# EAGLE board MeterMaidV2 (EAGLE 9.5.2)
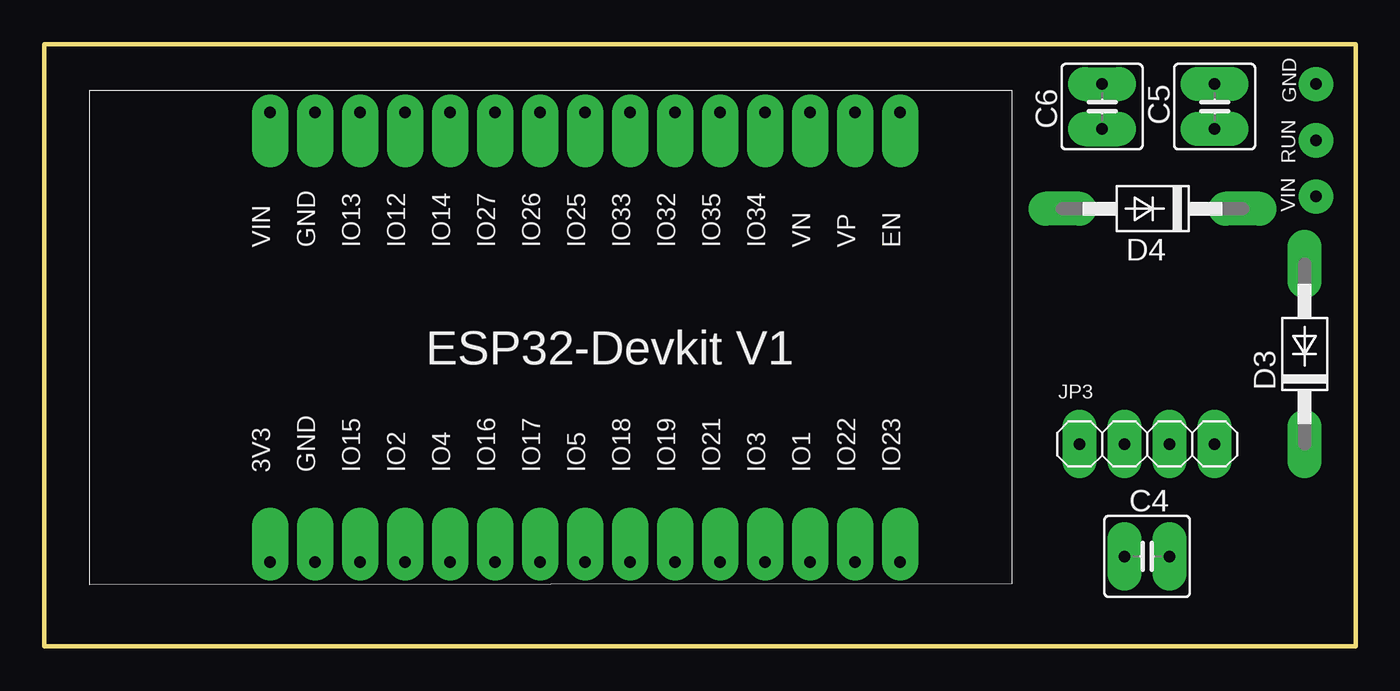
[diagram p0: board, top side]
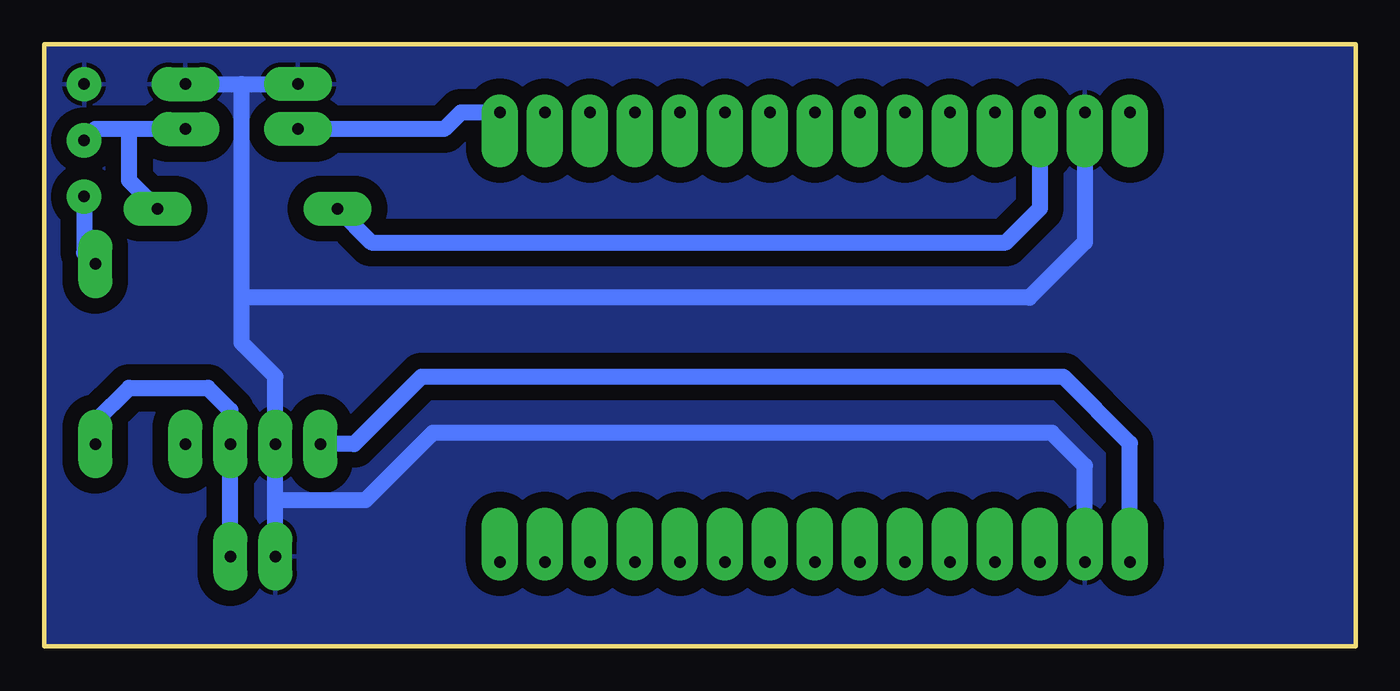
[diagram p1: board, bottom side, seen from below]

Size 74 x 34 mm. Coordinates in mm from the lower left corner, seen from the top.
Outline: 0,0 74,0 74,34 0,34 0,0
Copper layers (1*16): Top 0.035mm / dielectric 1.5mm / Bottom 0.035mm
Design rules "default *": minimum track width 6mil, minimum drill 0.35mm, track to track 6mil, track to pad 6mil, pad to pad 6mil, via to via 6mil, smd to smd 6mil, copper to edge 0mil, drill to drill 6mil, minimum pad ring 10mil, minimum via ring 8mil, stop-mask expansion 4mil, vias tented up to drill 0mil, thermal gap 10mil

## Footprints (pad centres in the part's own frame; a part is rotated, then mirrored left to right if it is on the bottom)
C025-050X050 = drill 0.65 pad 1.93 long: 1 -1.27,0; 2 1.27,0
DO41-10 = drill 0.65 pad 1.93 long: A 5.08,0; C -5.08,0
1X01LP = drill 0.65 pad 1.93: P$1 0,0
1X04 = drill 0.65 pad 1.93 long: 1 -3.81,0; 2 -1.27,0; 3 1.27,0; 4 3.81,0
ESP32-DEVKITV2 = drill 0.65 pad 2.057 offset: 1 -22.86,-13.97; 2 -20.32,-13.97; 3 -17.78,-13.97; 4 -15.24,-13.97; 5 -12.7,-13.97; 6 -10.16,-13.97; 7 -7.62,-13.97; 8 -5.08,-13.97; 9 -2.54,-13.97; 10 0,-13.97; 11 2.54,-13.97; 12 5.08,-13.97; 13 7.62,-13.97; 14 10.16,-13.97; 15 12.7,-13.97; 16 12.7,11.43; 17 10.16,11.43; 18 7.62,11.43; 19 5.08,11.43; 20 2.54,11.43; 21 0,11.43; 22 -2.54,11.43; 23 -5.08,11.43; 24 -7.62,11.43; 25 -10.16,11.43; 26 -12.7,11.43; 27 -15.24,11.43; 28 -17.78,11.43; 29 -20.32,11.43; 30 -22.86,11.43

## Placement (x,y rotation side)
C4  47uf  [C025-050X050]  62.23,5.08 0 top
C5  100nf  [C025-050X050]  66.04,30.48 90 top
C6  100nf  [C025-050X050]  59.69,30.48 270 top
D3  1N4004  [DO41-10]  71.12,16.51 90 top
D4  1N4004  [DO41-10]  62.53,24.71 180 top
GND  [1X01LP]  71.75,31.75 0 top
JP3  [1X04]  62.23,11.43 0 top
RUN  [1X01LP]  71.75,28.57 0 top
U$1  [ESP32-DEVKITV2]  35.6,18.72 0 top
VIN  [1X01LP]  71.75,25.4 0 top

## Library data of the parts
C4-C6 = rcl; SPICEPREFIX: C
D3 D4 GND JP3 RUN VIN = Sam
U$1 = ESP32-DEVKITV1MOD

## Nets
GND: C4.1 C5.2 C6.1 GND.P$1 JP3.2 U$1.2 U$1.29
N$1: JP3.1 U$1.1
N$2: C4.2 D3.C JP3.3
N$3: D4.A U$1.28
N$4: C5.1 D4.C RUN.P$1
N$5: C6.2 U$1.16
N$6: D3.A VIN.P$1

## Tracks (layer width: path | path; a pad name or v marks a point on that pad's centre or on a via)
GND
  Bottom 0.889: C5.2 62.87,31.75 | 62.87,31.75 C6.1 | 62.87,19.68 62.87,17.14 60.96,15.24 JP3.2 60.96,8.26 | 62.87,19.68 62.87,31.75 | C4.1 60.96,8.26 | U$1.29 15.28,22.82 18.41,19.68 62.87,19.68 | U$1.2 15.28,10.2 17.14,12.06 52.07,12.06 55.88,8.26 60.96,8.26
  pour Bottom (isolate 0.889): 0.03,33.99 73.99,33.99 73.99,0.03 0.03,0.03
N$1
  Bottom 0.889: U$1.1 12.74,11.47 16.51,15.24 52.7,15.24 56.52,11.43 JP3.1
N$2
  Bottom 0.889: C4.2 JP3.3 63.5,13.34 64.77,14.61 69.22,14.61 71.12,12.7 D3.C
N$3
  Bottom 0.889: U$1.28 17.82,24.73 19.74,22.81 55.55,22.81 D4.A
N$4
  Bottom 0.889: RUN.P$1 71.12,29.21 69.22,29.21 | C5.1 69.22,29.21 | D4.C 69.22,26.31 69.22,29.21
N$5
  Bottom 0.889: U$1.16 50.5,30.15 51.44,29.21 C6.2
N$6
  Bottom 0.889: VIN.P$1 71.75,22.23 D3.A